# Altium PCB PCB1.PcbDoc
Units mm, origin at the board's own origin, x right, y up, seen from the top; angles counter-clockwise.
Board outline 83 x 101.6 mm, 2 copper layers (Top Layer, Bottom Layer); 60 components, 53 nets, 242 pads, 22 vias.
Unrouted connection lines stored in the file: 3.
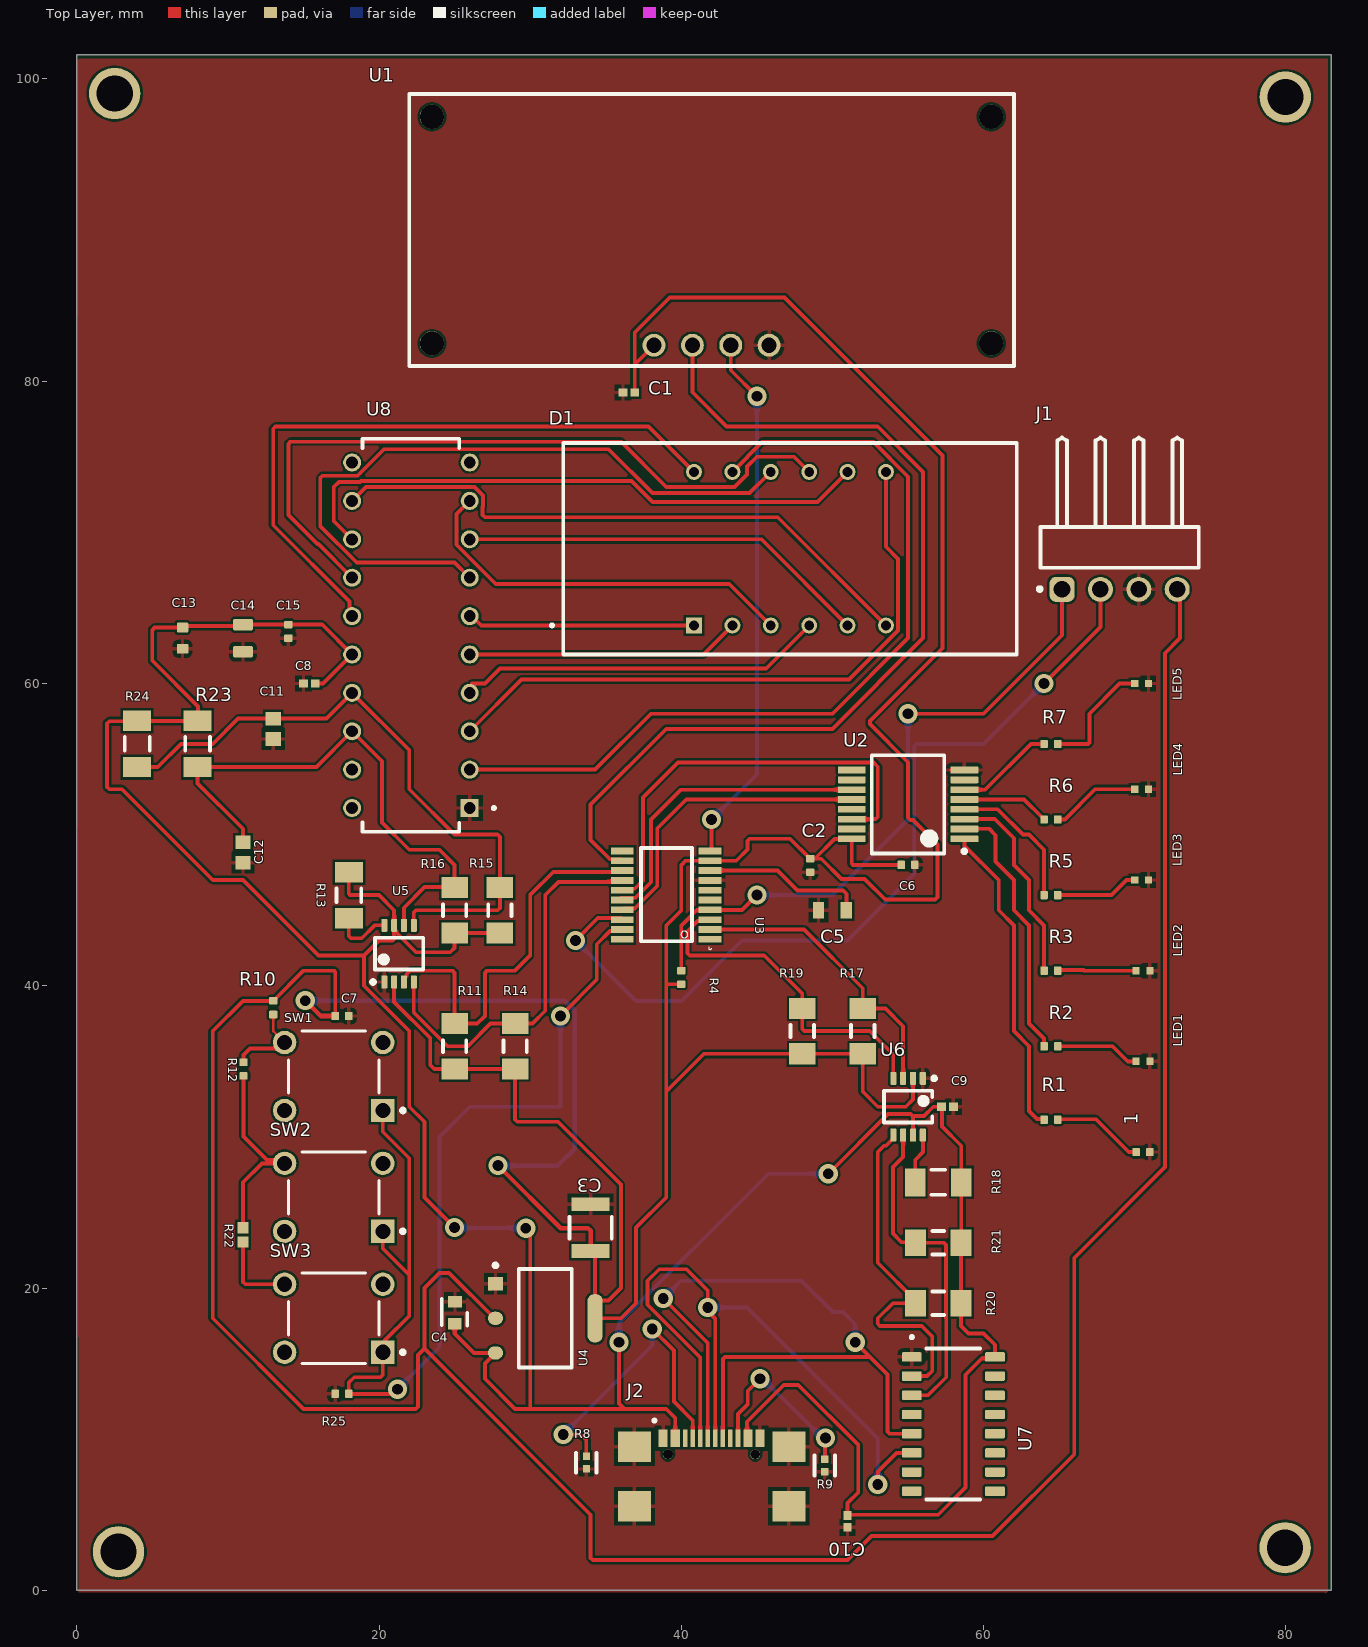
[diagram p0: Top Layer view]
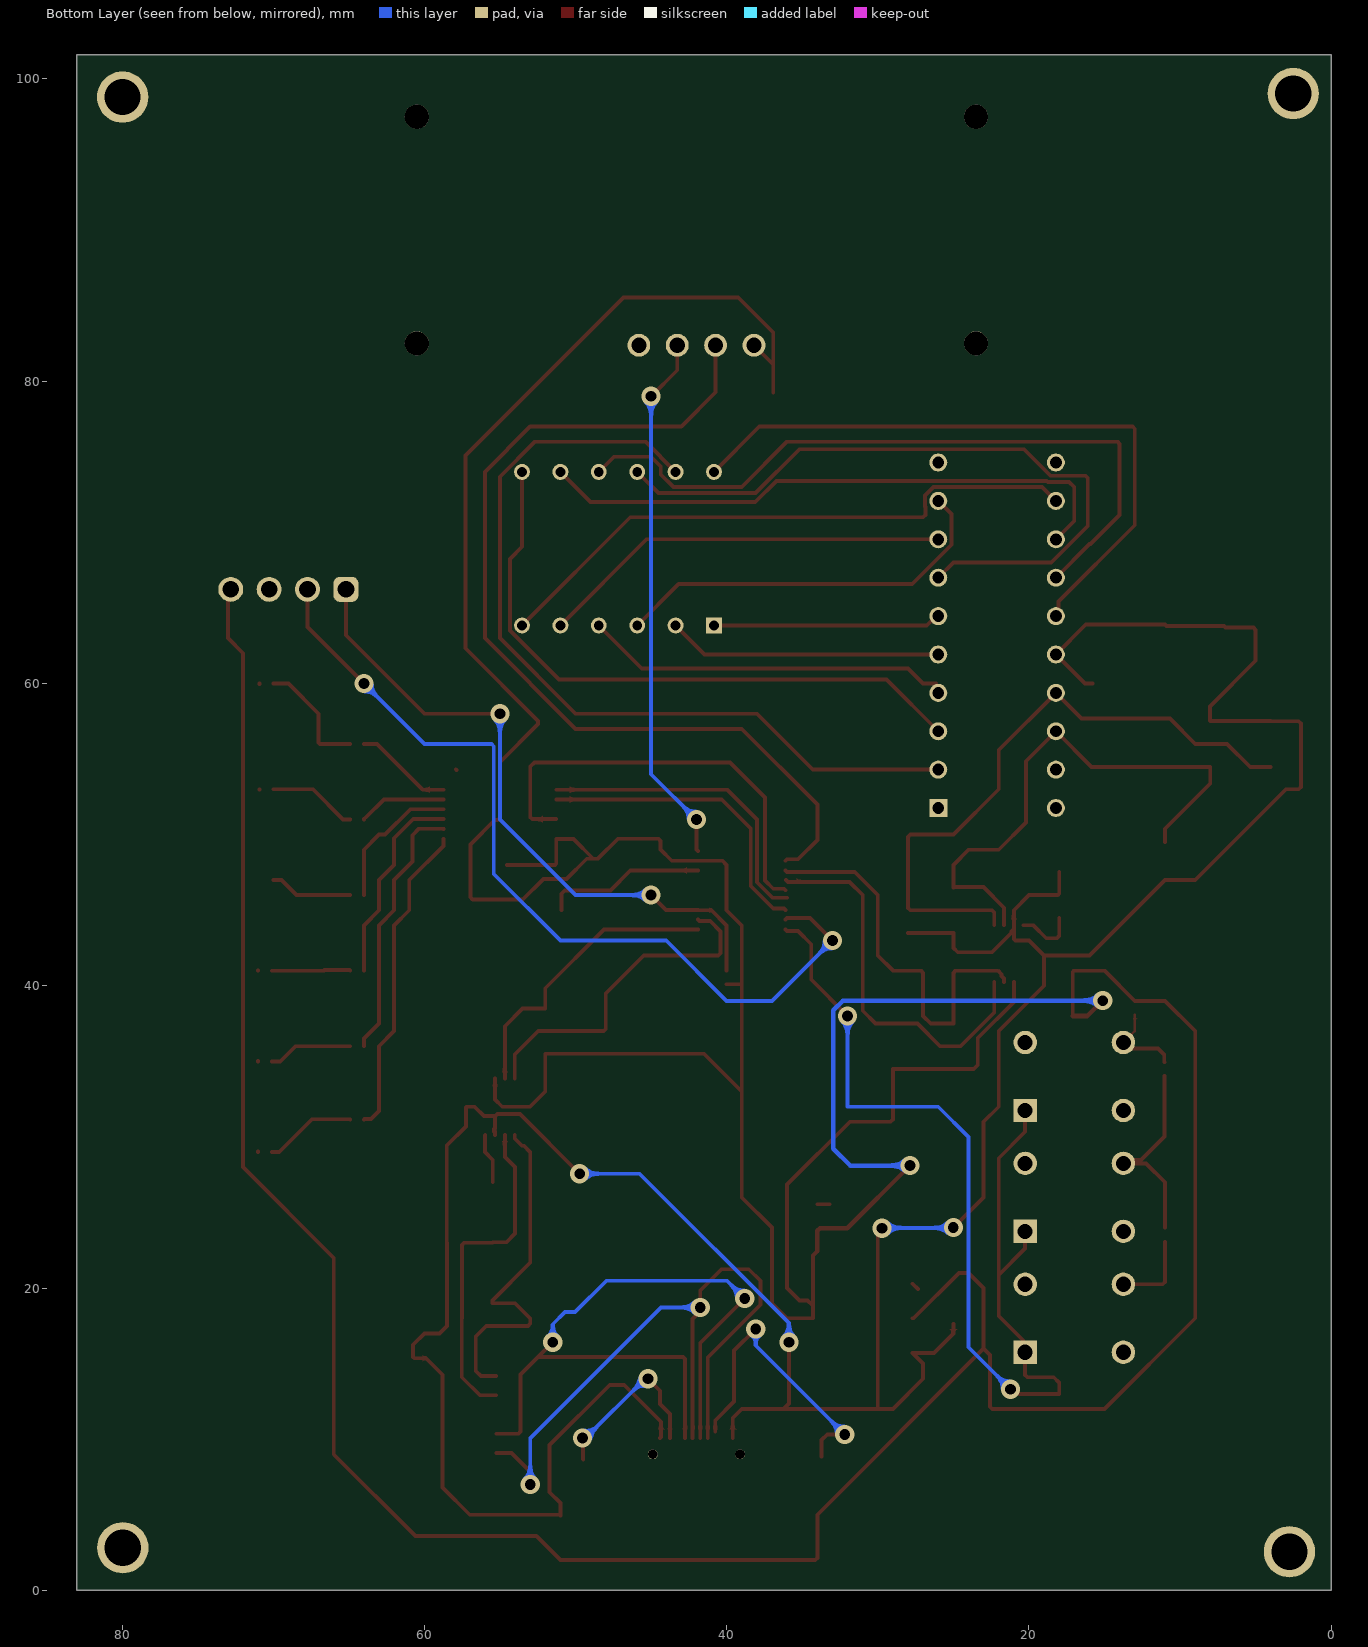
[diagram p1: Bottom Layer view, seen from below]
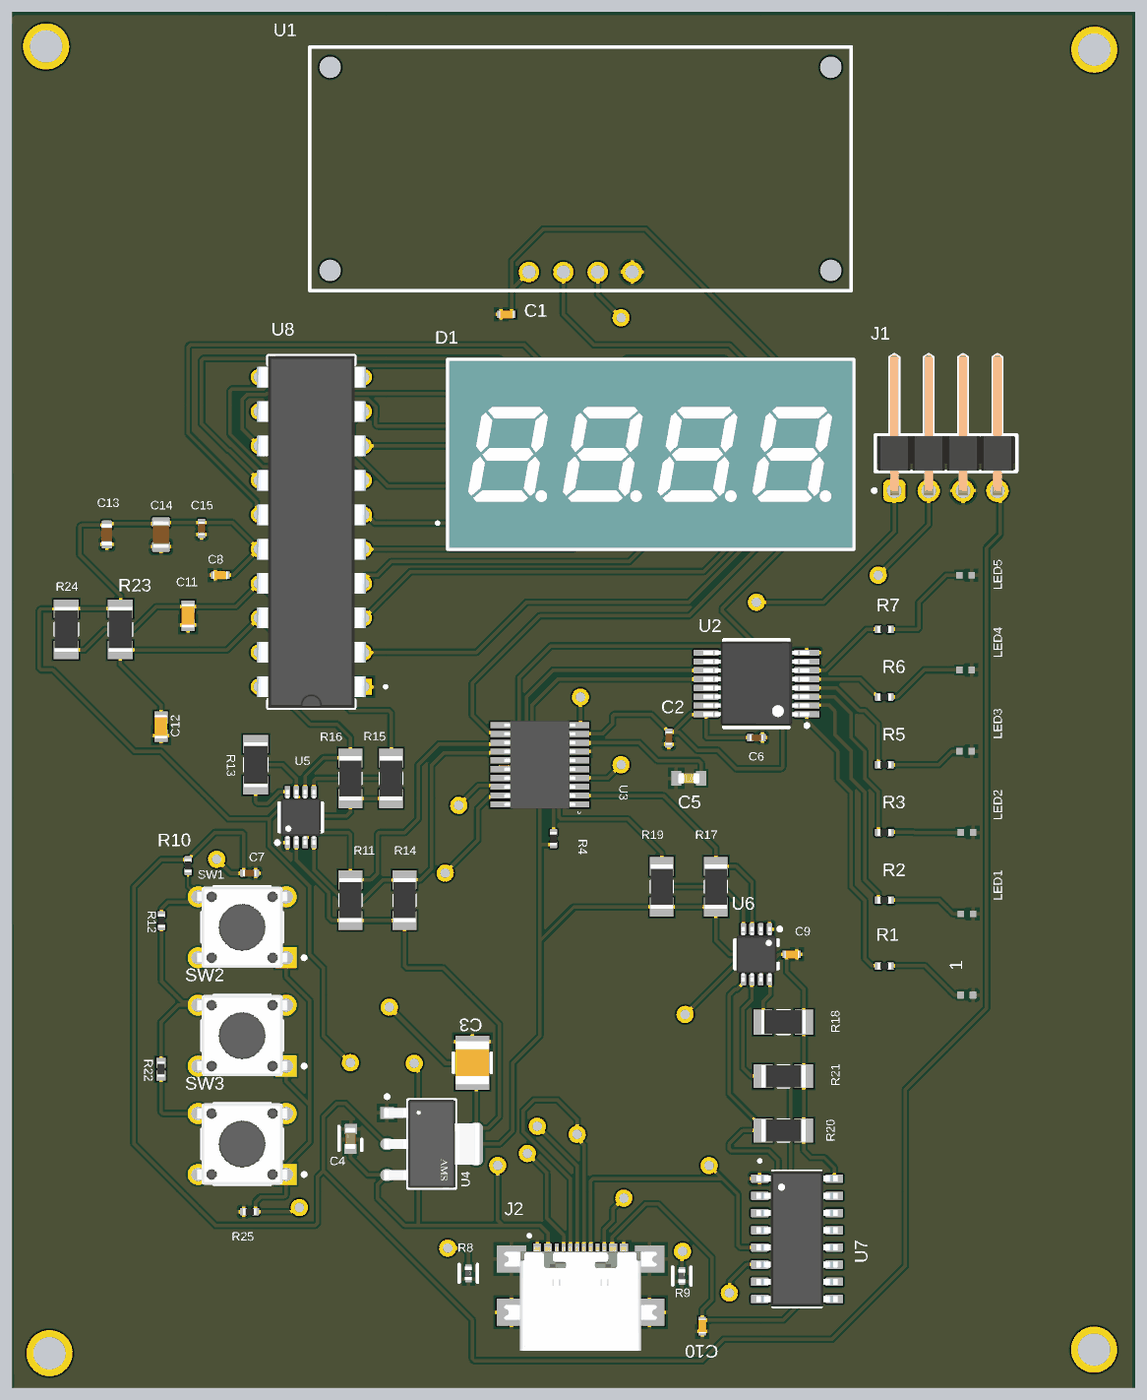
[diagram p2: 3D render of the assembled board from above, using the file's embedded part models]

## Layer stack, top to bottom
Top Solder: solder mask 0.0102, Solder Resist, Dk 3.5
Top Layer: signal copper 0.0356
Dielectric 1: dielectric 0.32, FR-4, Dk 4.8
Bottom Layer: signal copper 0.0356
Bottom Solder: solder mask 0.0102, Solder Resist, Dk 3.5

## Board outline
0,0 83,0 83,101.6 0,101.6

## Design rules (kind name [scope] priority, off if disabled: settings)
Clearance [All] p1: gap=0.152 ignorepadtopadclearanceinfootprint=FALSE
HoleSize [All] p1: absolutevalues=TRUE maxlimit=2.54 minlimit=0.3 maxpercent=80.000 minpercent=20.000
MinimumSolderMaskSliver [All] p1: minsoldermaskwidth=0.4
PolygonConnect [All] p1: connectstyle=Relief reliefconductorwidth=0.254 reliefentries=4 polygonreliefangle="90 Angle" airgapwidth=0.254
RoutingVias [All] p1: holewidth=0.711 width=1.27 viastyle="Through Hole" minholewidth=0.3 minwidth=1.27 maxholewidth=0.711 maxwidth=1.27
SolderMaskExpansion [All] p1: expansion=0.102 istentingtop=FALSE
SupplyNets "Schematic Supply Nets_4" [InNet('+5V')] p1: voltage=0.000
SupplyNets "Schematic Supply Nets_2" [InNet('GND')] p2: voltage=0.000
SupplyNets "Schematic Supply Nets" [InNet('+3.3V')] p3: voltage=0.000
Width [All] p1: maxlimit=0.3 minlimit=0.152 preferedwidth=0.254
28 further rules are at their usual default settings.

## Components (designator, comment, footprint, x,y, rotation, side; value= is the part's Value field where it differs from the comment)
1 "red_1" QTB-QBLP595_V#1 70.545,29 r180 top
C1 "Capacitor 0.1 uF +/- 5% 16 V 0402" CAPC1005X56X25LL10T15 36.528,79.25 r0 top value=100nF
C2 "Capacitor 100nF +/-20% 10V 0402" CAPC0402(1005)60_L 48.53,47.967 r90 top value=100nF
C3 "22uF" WCAP-CSGP_1210_L3.2W2.5H2.5 34,24 r270 top
C4 "10uF" FP-GRM18-0_15-MFG 25,18.411 r90 top
C5 "680nF" FP-CGA3E-0_3-0_1-IPC_B 50,45 r180 top
C6 "Capacitor 100nF +/-20% 10V 0402" CAPC0402(1005)60_L 55,48 r180 top value=100nF
C7 "Capacitor 100nF +/-20% 10V 0402" CAPC0402(1005)60_L 17.55,38 r0 top value=100nF
C8 "Capacitor 0.1 uF +/- 5% 16 V 0402" CAPC1005X56X25LL10T15 15.39,60 r180 top value=100nF
C9 "Capacitor 0.1 uF +/- 5% 16 V 0402" CAPC1005X56X25LL10T15 57.61,32 r0 top value=100nF
C10 "Capacitor 0.1 uF +/- 5% 16 V 0402" CAPC1005X56X25LL10T15 50.999,4.558 r90 top value=100nF
C11 "Capacitor 10 pF +/- 0.25 pF 50 V 0603" CAPC1608X87X35NL15T15 13,57 r90 top value=10pF
C12 "Capacitor 10 pF +/- 0.25 pF 50 V 0603" CAPC1608X87X35NL15T15 11,48.817 r90 top value=10pF
C13 "Capacitor 1µF +/-0.1% 25V 0603" CAPC0603(1608)100_L 7,63 r90 top value=1µF
C14 "Capacitor 100µF +/-20% 6.3V 0805" CAPC0805(2012)145_L 11,63 r90 top value=100µF
C15 "Capacitor 100nF +/-20% 10V 0402" CAPC0402(1005)60_L 14,63.45 r90 top value=100nF
D1 "LDQ-M3604RI" LED_LDQ-M3604RI 47.19,68.92 r0 top
J1 "STLINK" 61300411021 69,69 r180 top
J2 "TYPE C" GCT_USB4110GFA 42,9 r0 top
LED1 "red_2" QTB-QBLP595_V#2 70.545,35 r180 top
LED2 "QBLP595-IG" QTB-QBLP595_V#2 70.545,41 r180 top
LED3 "QBLP595-IG" QTB-QBLP595_V#2 70.455,47 r180 top
LED4 "QBLP595-IB" QTB-QBLP595_V#2 70.455,53 r180 top
LED5 "QBLP595-IB" QTB-QBLP595_V#2 70.455,60 r180 top
R1 "Resistor 240R +/-5 % 0402 63 mW" RESC0402(1005)_L 64.45,31.139 r0 top value=240
R2 "Resistor 240R +/-5 % 0402 63 mW" RESC0402(1005)_L 64.45,36 r0 top value=240
R3 "Resistor 240R +/-5 % 0402 63 mW" RESC0402(1005)_L 64.45,41 r0 top value=240
R4 "10KR2F" RESC0402(1005)_L 40,40.55 r270 top value=10k
R5 "Resistor 240R +/-5 % 0402 63 mW" RESC0402(1005)_L 64.45,46 r0 top value=240
R6 "Resistor 240R +/-5 % 0402 63 mW" RESC0402(1005)_L 64.45,51 r0 top value=240
R7 "Resistor 240R +/-5 % 0402 63 mW" RESC0402(1005)_L 64.45,56 r0 top value=240
R8 "5.1K" FP-RN73R1E-IPC_C 33.715,8.448 r90 top
R9 "5.1K" FP-RN73R1E-IPC_C 49.49,8.254 r90 top
R10 "1KR2J" RESC0402(1005)_L 13,38.55 r90 top value=1k
R11 "Resistor 1k +/-1% 1206 250 mW" RESC3116X70X50ML13T20 25,36 r90 top value=1k
R12 "5D6KR2J" RESC0402(1005)_L 11.033,34.49 r90 top value=5.6k
R13 "Resistor 100k +/-1% 1206 250 mW" RESC3216X60X45ML15T20 18,46 r90 top value=100k
R14 "Resistor 1k +/-1% 1206 250 mW" RESC3116X70X50ML13T20 29,36 r90 top value=1k
R15 "Resistor 1k +/-1% 1206 250 mW" RESC3116X70X50ML13T20 28,45 r90 top value=1k
R16 "Resistor 1k +/-1% 1206 250 mW" RESC3116X70X50ML13T20 25,45 r90 top value=1k
R17 "Resistor 1k +/-1% 1206 250 mW" RESC3116X70X50ML13T20 52,37 r90 top value=1k
R18 "Resistor 100k +/-1% 1206 250 mW" RESC3216X60X45ML15T20 57,27 r0 top value=100k
R19 "Resistor 1k +/-1% 1206 250 mW" RESC3116X70X50ML13T20 48,37 r90 top value=1k
R20 "Resistor 1k +/-1% 1206 250 mW" RESC3116X70X50ML13T20 57,19 r180 top value=1k
R21 "Resistor 1k +/-1% 1206 250 mW" RESC3116X70X50ML13T20 57,23 r180 top value=1k
R22 "Resistor 15k +/-1% 0402 63 mW" RESC1005X40X25ML10T10 11,23.525 r90 top value=15k
R23 "Resistor 10k +/-1% 1206 250 mW" RESC3216X60X45ML15T20 8,56 r90 top value=10k
R24 "Resistor 10k +/-1% 1206 250 mW" RESC3216X60X45ML15T20 4,56 r90 top value=10k
R25 "10KR2F" RESC0402(1005)_L 17.55,13 r0 top value=10k
SW1 "" FP-MJTP1230A-MFG 17,34 r180 top
SW2 "" FP-MJTP1230A-MFG 17,26 r180 top
SW3 "" FP-MJTP1230A-MFG 17,18 r180 top
U1 "SR-HC04" MODULE_4007 42,90 r0 top
U2 "SN74HC595N" DB0016A_M 55,52 r180 top
U3 "STM8S103F3P6" SOP65P640X120-20N 39,46 r180 top
U4 "AMS1117-3.3" FP-AMS1117-IPC_C 31,18 r0 top
U5 "PCA9306_TM1637" DCT0008A_L 21.325,42.125 r90 top
U6 "PCA9306_TTL" DCT0008A_L 55,32 r270 top
U7 "CH340C" SOIC127P600X180-16N 58,11 r0 top
U8 "TM1637" DIP778W43P254L2612H431Q20N 22.11,63.19 r180 top

## Footprints (in the part's own frame and the unit in brackets; to place one, negate y for a bottom-side part, rotate by r counter-clockwise, add the part's x,y. Pads: shape width x height; smd on the part's side, far side on the other; paste and mask are expansions set on the pad)
61300411021 [mm] "Pin Header, pitch 2.54 mm, THT, Angled, single row, 4p"
  rrect50% 1.65x1.65 hole 1.1: 1(3.81,2.77)
  round 1.65 hole 1.1: 2(1.27,2.77) 3(-1.27,2.77) 4(-3.81,2.77)
  silkscreen extent -5.23,-7.27 5.41,2.87, body extent -5.08,-7.27 5.08,3.09, height 2.58
CAPC0402(1005)60_L [mm] "Chip Capacitor, Body 1.0x0.5mm, Height 0.6mm, IPC High Density"
  rrect25% 0.5x0.55 smd: 1(-0.45,0) 2(0.45,0)
  body extent -0.5,-0.25 0.5,0.25, height 0.6
CAPC0603(1608)100_L [mm] "Chip Capacitor, Body 1.6x0.8mm, Height 1.0mm, IPC High Density"
  rrect25% 0.66x0.76 smd: 1(-0.7,0) 2(0.7,0)
  body extent -0.8,-0.4 0.8,0.4, height 0.95
CAPC0805(2012)145_L [mm] "Chip Capacitor, Body 2.0x1.2mm, Height 1.45mm, IPC High Density"
  rrect25% 0.76x1.3 smd: 1(-0.9,0) 2(0.89,0)
  body extent -1,-0.6 1,0.6, height 1.45
CAPC1005X56X25LL10T15 [mm] "Chip Capacitor, 2-Leads, Body 1.10x0.60mm, IPC High Density"
  rect 0.58x0.54 smd: 1(-0.39,0) 2(0.39,0)
  body extent -0.55,-0.3 0.55,0.3, height 0.56
CAPC1608X87X35NL15T15 [mm] "Chip Capacitor, 2-Leads, Body 1.75x0.95mm, IPC Medium Density"
  rect 0.9x1 smd: 1(-0.675,0) 2(0.675,0)
  body extent -0.87,-0.48 0.87,0.48, height 0.87
DB0016A_M [mm] "SOP, 16-Leads, Body 5.6x6.5mm, Pitch 0.65mm, IPC Low Density"
  rrect22% 1.85x0.45 smd: 1(-3.725,2.275) 2(-3.725,1.625) 3(-3.725,0.975) 4(-3.725,0.325) 5(-3.725,-0.325) 6(-3.725,-0.975) 7(-3.725,-1.625) 8(-3.725,-2.275) 9(3.725,-2.275) 10(3.725,-1.625) 11(3.725,-0.975) 12(3.725,-0.325) 13(3.725,0.325) 14(3.725,0.975) 15(3.725,1.625) 16(3.725,2.275)
  silkscreen extent -3.85,-3.25 2.4,3.25, body extent -3.91,-3.1 3.91,3.1, height 2
DCT0008A_L [mm] "SOP, 8-Leads, Body 2.9x3.2mm, Pitch 0.65mm, IPC High Density"
  rrect25% 0.85x0.4 smd: 1(-1.875,0.975) 2(-1.875,0.325) 3(-1.875,-0.325) 4(-1.875,-0.975) 5(1.875,-0.975) 6(1.875,-0.325) 7(1.875,0.325) 8(1.875,0.975)
  silkscreen extent -2,-1.6 1.05,1.85, body extent -2.01,-1.47 2.01,1.48, height 1.3
DIP778W43P254L2612H431Q20N [mm]
  rect 1.19x1.19 / inner round 1.19 / far side rect 1.19x1.19 hole 0.79: 1(-3.89,11.43)
  round 1.19 hole 0.79: 2(-3.89,8.89) 3(-3.89,6.35) 4(-3.89,3.81) 5(-3.89,1.27) 6(-3.89,-1.27) 7(-3.89,-3.81) 8(-3.89,-6.35) 9(-3.89,-8.89) 10(-3.89,-11.43) 11(3.89,-11.43) 12(3.89,-8.89) 13(3.89,-6.35) 14(3.89,-3.81) 15(3.89,-1.27) 16(3.89,1.27) 17(3.89,3.81) 18(3.89,6.35) 19(3.89,8.89) 20(3.89,11.43)
  silkscreen extent -5.59,-13 3.2,13, body extent -4.03,-13 4.03,13, height 4.31
FP-AMS1117-IPC_C [mm]
  rect 1.004x0.872 smd paste+0 mask+0: 1(-3.295,2.29)
  rrect100% 1.004x0.872 smd paste+0 mask+0: 2(-3.295,0) 3(-3.295,-2.29)
  rrect87% 1.004x3.182 smd paste+0 mask+0: 4(3.295,0)
  silkscreen extent -3.42,-3.25 1.75,3.62, body extent -3.9,-3.35 3.9,3.35, height 0.25
FP-CGA3E-0_3-0_1-IPC_B [mm]
  rect 0.756x1.106 smd paste+0 mask+0: 1(-0.925,0) 2(0.925,0)
  body extent -1.55,-0.8 1.55,0.8, height 0.25
FP-GRM18-0_15-MFG [mm]
  rect 0.75x0.9 smd paste+0 mask+0: 1(-0.775,0) 2(0.69,-0.023)
  silkscreen extent -0.88,-0.83 0.87,0.85, body extent -1.25,-0.58 1.25,0.58, height 0.25
FP-MJTP1230A-MFG [mm]
  rect 1.55x1.55 hole 1 paste-2539.97 mask+0: 1(-3.25,2.25)
  round 1.55 hole 1 paste-2539.97 mask+0: 2(3.25,2.25) 3(-3.25,-2.25) 4(3.25,-2.25)
  silkscreen extent -4.7,-3 3,2.37, body extent -4.13,-3.13 4.13,3.13, height 0.25
FP-RN73R1E-IPC_C [mm]
  rect 0.488x0.472 smd paste+0 mask+0: 1(-0.414,0) 2(0.414,0)
  silkscreen extent -0.66,-0.67 0.66,0.67, body extent -0.76,-0.38 0.76,0.38, height 0.25
GCT_USB4110GFA [mm]
  rect 0.6x1.15 smd mask+0.1: A1/B12(-3.2,1.075) B1/A12(3.2,1.075)
  rect 0.6x1.15 smd: A4/B9(-2.4,1.075) B4/A9(2.4,1.075)
  rect 0.3x1.15 smd: A5(-1.25,1.075) A6(-0.25,1.075) A7(0.25,1.075) A8(1.25,1.075) B5(1.75,1.075) B6(0.75,1.075) B7(-0.75,1.075) B8(-1.75,1.075)
  rect 2.18x2 smd mask+0.002: S1(-5.11,0.5) S2(5.11,0.5)
  rect 2.18x2 smd: S3(-5.11,-3.43) S4(5.11,-3.43)
  round 0.65 hole 0.65 unplated: ""(-2.89,0) ""(2.89,0)
  silkscreen extent -3.88,2.13 -3.68,2.33, body extent -5.65,-6.28 5.65,1.42, height 3.26
LED_LDQ-M3604RI [mm]
  rect 1.05x1.05 / inner round 1.05 / far side rect 1.05x1.05 hole 0.65: 1(-6.35,-5.08)
  round 1.05 hole 0.65: 2(-3.81,-5.08) 3(-1.27,-5.08) 4(1.27,-5.08) 5(3.81,-5.08) 6(6.35,-5.08) 7(6.35,5.08) 8(3.81,5.08) 9(1.27,5.08) 10(-1.27,5.08) 11(-3.81,5.08) 12(-6.35,5.08)
  silkscreen extent -15.85,-7 15,7, body extent -15,-7 15,7, height 7.2
MODULE_4007 [mm]
  round 1.508 hole 1: 1(-3.81,-7.62) 2(-1.27,-7.62) 3(1.27,-7.62) 4(3.81,-7.62)
  round 1.6 hole 1.6 unplated: ""(-18.5,-7.5) ""(-18.5,7.5) ""(18.5,-7.5) ""(18.5,7.5)
  silkscreen extent -20,-9 20,9
QTB-QBLP595_V#1 [mm] "SMD, 2-Leads, Body 1x0.5mm"
  rrect25% 0.5x0.55 smd mask-0.05: 1(-0.455,0) 2(0.455,0)
  body extent -0.5,-0.25 0.5,0.25, height 0.5
QTB-QBLP595_V#2 [mm] "SMD, 2-Leads, Body 1x0.5mm"
  rect 0.472x0.488 smd paste+0 mask+0: 1(-0.455,0) 2(0.455,0)
  body extent -0.5,-0.25 0.5,0.25, height 0.5
RESC0402(1005)_L [mm] "Chip Resistor, Body 1.0x0.5mm, IPC High Density"
  rrect25% 0.5x0.55 smd: 1(-0.45,0) 2(0.45,0)
  body extent -0.5,-0.25 0.5,0.25, height 0.3
RESC1005X40X25ML10T10 [mm] "Chip Resistor, 2-Leads, Body 1.1x0.6mm, IPC Low Density"
  rect 0.75x0.7 smd: 1(-0.475,0) 2(0.475,0)
  body extent -0.55,-0.27 0.55,0.28, height 0.4
RESC3116X70X50ML13T20 [mm] "Chip Resistor, 2-Leads, Body 3.25x1.65mm, IPC Low Density"
  rect 1.4x1.75 smd: 1(-1.5,0) 2(1.5,0)
  silkscreen extent -0.4,-0.77 0.4,0.77, body extent -1.63,-0.82 1.63,0.82, height 0.7
RESC3216X60X45ML15T20 [mm] "Chip Resistor, 2-Leads, Body 3.3x1.75mm, IPC Low Density"
  rect 1.35x1.85 smd: 1(-1.525,0) 2(1.525,0)
  silkscreen extent -0.45,-0.82 0.45,0.82, body extent -1.65,-0.87 1.65,0.87, height 0.6
SOIC127P600X180-16N [mm]
  rrect25% 1.31x0.62 smd: 1(-2.75,4.445) 2(-2.75,3.175) 3(-2.75,1.905) 4(-2.75,0.635) 5(-2.75,-0.635) 6(-2.75,-1.905) 7(-2.75,-3.175) 8(-2.75,-4.445) 9(2.75,-4.445) 10(2.75,-3.175) 11(2.75,-1.905) 12(2.75,-0.635) 13(2.75,0.635) 14(2.75,1.905) 15(2.75,3.175) 16(2.75,4.445)
  silkscreen extent -2.85,-5 1.78,5.85, body extent -3,-5 3,5, height 1.8
SOP65P640X120-20N [mm]
  rect 1.5x0.45 smd: 1(-2.9,2.925) 2(-2.9,2.275) 3(-2.9,1.625) 4(-2.9,0.975) 5(-2.9,0.325) 6(-2.9,-0.325) 7(-2.9,-0.975) 8(-2.9,-1.625) 9(-2.9,-2.275) 10(-2.9,-2.925) 11(2.9,-2.925) 12(2.9,-2.275) 13(2.9,-1.625) 14(2.9,-0.975) 15(2.9,-0.325) 16(2.9,0.325) 17(2.9,0.975) 18(2.9,1.625) 19(2.9,2.275) 20(2.9,2.925)
  silkscreen extent -3,-3.11 1.66,3.6, body extent -3.2,-3.25 3.2,3.25, height 0.53
WCAP-CSGP_1210_L3.2W2.5H2.5 [mm] "Ceramic Capacitors, body 3.2x2.5mm"
  rect 0.9x2.5 smd: 1(-1.55,0) 2(1.55,0)
  silkscreen extent -0.72,-1.4 0.72,1.4, body extent -1.6,-1.25 1.6,1.25, height 2.5

## Part data
1 LED1: library part CMP-007-00040-3, "Chip LED 0402, Red, 0.02 A, 2.0 to 2.5 V, -40 to 80 degC, 2-Pin SMD, RoHS, Tape and Reel", Case/Package=0402, Colour=Red, Mounting Technology=SMT, Pins=2, RoHS Compliant=Yes
C1 C8 C9 C10: library part CMP-001-00001-6, "Chip Capacitor, 0.1 uF, +/- 5%, 16 V, 0402 (1005 Metric)", Capacitor Type=Ceramic, Case/Package=0402, Max Operating Temperature=125°C, Min Operating Temperature=-55°C, Tolerance=5%, Voltage Rating=16V, Mounting Technology=SM, Pins=2, RoHS Compliant=True
C2 C6 C7 C15: library part CMP-001-00061-3, "Chip Capacitor, 100nF +/-20%, 10V, 0402, Thickness 0.6 mm", Case/Package=0402, Max Operating Temperature=85°C, Min Operating Temperature=-55°C, Tolerance=20%, Voltage Rating=10V, Mounting Technology=SMT, Pins=2
C3: library part CMP-03913-54202747-1, "885012209006 Multilayer Ceramic Capacitor, Wcap-Csgp Series, 22 F, 10%, X7R, 10 V, 1210 [3225 Metric] Rohs Compliant: Yes", Capacitance=22µF, Case Code (Imperial)=1210, Case Code (Metric)=3225, Dielectric=X7R, Insulation Resistance=20MΩ, Max Operating Temperature=125°C, Min Operating Temperature=-55°C, Tolerance=10%, Voltage Rating=10V, Case/Package=1210, Height=2.5mm, Length=3.2mm, Mount="Surface Mount", NexarPartId=54202747, Packaging="Tape & Reel (TR)", REACH SVHC=Unknown, RoHS=Compliant, Thickness=2.794mm, Voltage Rating (DC)=10V, Width=2.5mm
C4: library part CMP-2000-05448-2, "CAP CER 10UF 10V X5R 0603", Manufacturer=Murata, Manufacturer Part Number=GRM188R61A106KE69D, Package=GRM18-0.15, Temperature="-55°C to +85°C", Temperature Characteristic=X5R, Temperature Coefficient=15%, Temperature Range High=+85°C, Temperature Range Low=-55°C, Tolerance=10%, Voltage Rating=10V, Automotive=No, Capacitance=10uF, Category=Cap, ComponentLink2Description=Datasheet, ComponentLink2URL=https://search.murata.co.jp/Ceramy/image/img/A01X/G101/ENG/GRM188R61A106KE69-01A.pdf, Device Class L1="Passive Components", Device Class L2=Capacitors, Device Class L3="Ceramic Capacitors", Digikey Description="CAP CER 10UF 10V X5R 0603", Height=0.95mm, Lead Free=Yes, Material=Ceramic, Mouser Description="Multilayer Ceramic Capacitors MLCC - SMD/SMT 0603 10uF 10volts X5R + - 10%", Octopart=https://octopart.com/grm188r61a106ke69d-murata-22851381, RoHS=TRUE
C5: library part CMP-08246-000719-1, "Cap Ceramic 680nF 16V X7R 10% Pad SMD 0603 +125°C Automotive T/R", Case Code (Imperial)=0603, Case Code (Metric)=1608, Dielectric=X7R, Max Operating Temperature=125°C, Min Operating Temperature=-55°C, Package Quantity=1, Ratings=AEC-Q200, Tolerance=10%, Voltage Rating=16V, Capacitance=680nF, Case/Package=0603, Composition=Ceramic, Depth=0.8mm, Height=0.8mm, Lead Free="Lead Free", Length=1.6mm, Mount="Surface Mount", Packaging="Tape and Reel", REACH SVHC="No SVHC", Termination=SMD/SMT, Thickness=0.035inch, Voltage Rating (DC)=16V, Weight=7.1E-05oz, Width=0.031inch
C11 C12: library part CMP-001-00012-6, "Chip Capacitor, 10 pF, +/- 0.25 pF, 50 V, 0603 (1608 Metric)", Capacitor Type=Ceramic, Case/Package=0603, Max Operating Temperature=125°C, Min Operating Temperature=-55°C, Tolerance=0.25%, Voltage Rating=50V, Mounting Technology=SM, Pins=2, RoHS Compliant=True
C13: library part CMP-001-00055-4, "Chip Capacitor, 1µF +/-0.1%, 25V, 0603, Thickness 1 mm", Case/Package=0603, Max Operating Temperature=85°C, Min Operating Temperature=-55°C, Tolerance=20%, Voltage Rating=25V, Mounting Technology=SMT, Pins=2
C14: library part CMP-001-00054-4, "Chip Capacitor, 100µF +/-20%, 6.3V, 0805, Thickness 1.45 mm", Case/Package=0805, Max Operating Temperature=85°C, Min Operating Temperature=-55°C, Tolerance=10%, Voltage Rating=6.3V, Mounting Technology=SMT, Pins=2
D1: library part CMP-004-00032-1, "Display, Seven Segment, 9.2MM, Red", Case/Package=None, Check_prices=https://www.snapeda.com/parts/LDQ-M3604RI/Lumex/view-part/?ref=eda, Component Type=Standard, Design Item ID=LDQ-M3604RI, MF=Lumex, MP=LDQ-M3604RI, Pins=12, SnapEDA_Link=https://www.snapeda.com/parts/LDQ-M3604RI/Lumex/view-part/?ref=snap, Source=LDQ-M3604RI.SchLib
J1: library part CMP-007-000000-1, Color=Black, Contact Resistance=20m?, Current Rating=3A, Operating Supply Voltage=250V, Component Type=Standard, Connector Type="Male Pin", Contact Material=Copper, Contact Mating Length=5.9944mm, Contact Plating=Gold, Design Item ID=CMP-1502-01063-3, Gender=Male, Lead Pitch=2.54mm, Mount="Through Hole", NexarPartId=31153320, Number of Contacts=4, Number of Pins=4, Number of Positions=4, Number of Rows=1, Pin Count=4, Pitch=2.54mm, REACH SVHC=Unknown, RoHS=Compliant, Source="Components - 25.08.25 - 11.48.SchLib", Termination=Solder
J2: library part CMP-002-00071-1, "USB-C (USB TYPE-C) USB 2.0 Receptacle Connector 24 (16+8 Dummy) Position Surface Mount, Right Angle", Case/Package=None, Check_prices=https://www.snapeda.com/parts/USB4110GFA/Global+Connector+Technology/view-part/?ref=eda, Component Type=Standard, Design Item ID=USB4110GFA, MF="Global Connector Technology", MP=USB4110GFA, Pins=16, SnapEDA_Link=https://www.snapeda.com/parts/USB4110GFA/Global+Connector+Technology/view-part/?ref=snap, Source=USB4110GFA.SchLib
LED2 LED3: library part CMP-007-00041-3, "Chip LED 0402, Green, 0.02 A, 3.1 to 3.7 V, -40 to 80 degC, 2-Pin SMD, RoHS, Tape and Reel", Case/Package=0402, Colour=Green, Mounting Technology=SMT, Pins=2, RoHS Compliant=Yes
LED4 LED5: library part CMP-007-00042-3, "Chip LED 0402, Blue, 0.02 A, 3.1 to 3.7 V, -40 to 80 degC, 2-Pin SMD, RoHS, Tape and Reel", Case/Package=0402, Colour=Blue, Mounting Technology=SMT, Pins=2, RoHS Compliant=Yes
R1 R2 R3 R5 R6 R7: library part CMP-009-00155-3, "Chip Resistor, 240 Ohms, +/-5 %, 63 mW, -55 to 155 degC, 0402", Case/Package=0402, Max Operating Temperature=155°C, Min Operating Temperature=-55°C, Power=63mW, Tolerance=5%, Pins=2
R4 R25: library part CMP-009-00066-2, "10K 0.063W 1% 0402 (1005 Metric)  SMD", Case/Package=0402, Power=63mW, Tolerance=1%, Mounting Technology=SMT, Pins=2
R8 R9: library part CMP-04015-008529-1, "5.1kΩ ±1% 0.063W, 1/16W Chip Resistor 0402 (1005 Metric) Moisture Resistant Thin Film"
R10: library part CMP-009-00075-2, "1K 0.063W 5% 0402 (1005 Metric)  SMD", Case/Package=0402, Power=63mW, Tolerance=5%, Mounting Technology=SMT, Pins=2
R11 R14 R15 R16 R17 R19 R20 R21: library part CMP-009-00011-5, "Chip Resistor, 1 KOhm, +/- 1%, 0.25 W, -55 to 155 degC, 1206 (3216 Metric)", Case/Package=1206, Max Operating Temperature=155°C, Min Operating Temperature=-55°C, Power=250mW, Tolerance=1%, Voltage Rating=200V, Mounting Technology=SM, Pins=2, RoHS Compliant=True
R12: library part CMP-009-00108-2, "5K6 0.063W 5% 0402 (1005 Metric)  SMD", Case/Package=0402, Power=63mW, Tolerance=5%, Mounting Technology=SMT, Pins=2
R13 R18: library part CMP-009-00025-5, "Chip Resistor, 100 KOhm, +/- 1%, 0.25 W, -55 to 155 degC, 1206 (3216 Metric)", Case/Package=1206, Max Operating Temperature=155°C, Min Operating Temperature=-55°C, Power=250mW, Tolerance=1%, Voltage Rating=200V, Mounting Technology=SM, Pins=2, RoHS Compliant=True
R22: library part CMP-009-00026-5, "Chip Resistor, 15 KOhm, +/- 1%, 0.063 W, -55 to 155 degC, 0402 (1005 Metric)", Case/Package=0402, Max Operating Temperature=155°C, Min Operating Temperature=-55°C, Power=63mW, Tolerance=1%, Mounting Technology=SM, Pins=2, RoHS Compliant=True
R23 R24: library part CMP-009-00016-5, "Chip Resistor, 10 KOhm, +/- 1%, 0.25 W, -55 to 155 degC, 1206 (3216 Metric)", Case/Package=1206, Max Operating Temperature=155°C, Min Operating Temperature=-55°C, Power=250mW, Tolerance=1%, Voltage Rating=200V, Mounting Technology=SM, Pins=2, RoHS Compliant=True
SW1 SW2 SW3: library part CMP-47024-000004-1, "SWITCH TACTILE SPST-NO 0.05A 12V", Actuator Color=Black, Contact Resistance=100mR, Current Rating=50mA, Max Operating Temperature=70°C, Max Voltage Rating (DC)=12V, Min Operating Temperature=-20°C, Operating Force=160gf, Package Quantity=2000, Actuator Length=1.4mm, Actuator Material=Thermoplastic, Actuator Type=Standard, Color=Black, Contact Material=Bronze, Contact Plating=Silver, Electrical Life=100000Cycles, Illumination Type=Non-Illuminated, Mechanical Life=100000Cycles, Mount="Through Hole", Orientation=Straight, Packaging=Bulk, REACH SVHC="No SVHC", RoHS Compliant=Yes, Series=MJTP, Switch Function=Off-Mom, Switch Travel=0.25mm, Termination="PC Pin", Throw Configuration=SPST, Voltage Rating (DC)=12V
U1: library part CMP-015-000000-1, "Ultrasonic Distance Sensor - 3V or 5V - HC-SR04 compatible - RCWL-1601", Package=None, Check_prices=https://www.snapeda.com/parts/4007/Adafruit+Industries+LLC/view-part/?ref=eda, Component Type=Standard, Design Item ID=4007, MF="Adafruit Industries", MP=4007, Pin Count=4, SnapEDA_Link=https://www.snapeda.com/parts/4007/Adafruit+Industries+LLC/view-part/?ref=snap, Source=4007.SchLib
U2: library part CMP-0780-00077-3, "8-Bit Shift Registers With 3-State Output Registers, DB0016A, LARGE T&R", F @ Nom Voltage(Max)(Mhz)=28, Generic Part Number=SN74HC595, ICC @ Nom Voltage(Max)(mA)=0.08, Manufacturer="Texas Instruments", Operating Temperature Range(C)="-40 to 85", Rating=Military, tpd @ Nom Voltage(Max)(ns)=34, Voltage(Nom)(V)=6, 3-State Output=Yes, Code_JEDEC=MO-150, DatasheetVersion=SCLS041H, Input Type=CMOS, Output Drive (IOL/IOH)(Max)(mA)=7.8/-7.8, Output Type=CMOS, PackageReference=DB0016A, PackageVersion=http://www.ti.com/lit/ml/mpds507/mpds507.pdf, Technology Family=HC, VCC(Max)(V)=6, VCC(Min)(V)=2
U3: library part CMP-031-00006-1, "STM8 series Microcontroller IC 8-Bit 16MHz 8KB (8K x 8) FLASH 20-TSSOP", Case/Package="TSSOP-20 STMicroelectronics", Check_prices=https://www.snapeda.com/parts/STM8S103F3P6/STMicroelectronics/view-part/?ref=eda, Component Type=Standard, Design Item ID=STM8S103F3P6, MF=STMicroelectronics, MP=STM8S103F3P6, Pins=20, SnapEDA_Link=https://www.snapeda.com/parts/STM8S103F3P6/STMicroelectronics/view-part/?ref=snap, Source=STM8S103F3P6.SchLib
U4: library part CMP-209535-000001-1, "LDO Voltage Regulators 1A, 3.3V", Dropout Voltage=1.1V, Manufacturer="Advanced Monolithic Systems", Max Junction Temp=+125°C, Max Power Dissipation=1.2W, Max Supply Voltage=15V, Nominal Supply Current=5mA, Output Current=1A, Output Voltage=3.3V, Package=AMS1117, Temperature="-40°C to +125°C", Temperature Range Low=-40°C, Automotive=No, Category=IC, ComponentLink2Description=Datasheet, ComponentLink2URL=http://www.advanced-monolithic.com/pdf/ds1117.pdf, Device Class L1="Integrated Circuits (ICs)", Device Class L2="Power Management ICs", Device Class L3="Voltage Regulators - Linear", Height=1.8mm, Ipc Land Pattern Name=SOT229P700X180-4, Lead Free=Yes, Manufacturer Part Number=AMS1117-3.3, Number Of Outputs=1, Octopart=https://octopart.com/ams1117-3.3-advanced+monolithic+systems-25899300, Output Type=Fixed, RoHS=TRUE, Standoff Height=0.64mm, Temperature Range High=+125°C
U5 U6: library part CMP-0314-00283-2, "Dual Bi-Directional I2C-Bus and SMBus Voltage Level-Translator, 0 to 5.5 V, -40 to 85 degC, 8-pin SM8 (DCT), Green (RoHS & no Sb/Br)", 5V Tolerant I/O=Yes, Manufacturer="Texas Instruments", Max Frequency(kHz)=400, On-Chip Power-on-Reset=No, PartNumber=PCA9306DCTR, Rating=Catalog, Code_JEDEC=MO-187-DA, ComponentLink1Description=Datasheet, ComponentLink1URL=http://www.ti.com/general/docs/lit/getliterature.tsp?genericPartNumber=PCA9306&fileType=pdf, ComponentLink2Description="Package Specification", ComponentLink2URL=http://www.ti.com/litv/pdf/mpds049b, DatasheetVersion=SCPS113J, Eco-Plan="Green (RoHS & no Sb/Br)", Enable Pin=Yes, fSCLK(Max)(MHz)=400, Function="Voltage Translator", Mounting Technology="Surface Mount", No. of Outputs=2, Open Drain I/O Type=Yes, PackageDescription="8-Pin Thin Small Outline Package 3 x 2.8 mm Body ,0.65 mm Pitch", PackageReference=DCT0008A, PackageVersion="revC, Sep-2002", SubFamily="I2C Special Function", tpd max(ns)=1.5, Vcc range(V)="0 to 5.5"
U7: library part CMP-030-000000-1, "USB to serial chip CH340", Package=None, Availability="Not in stock", Check_prices=https://www.snapeda.com/parts/CH340C/WCH/view-part/?ref=eda, Component Type=Standard, Design Item ID=CH340C, MF=WCH, MP=CH340C, Pin Count=16, Price=None, SnapEDA_Link=https://www.snapeda.com/parts/CH340C/WCH/view-part/?ref=snap, Source=CH340C.SchLib
U8: library part CMP-005-000000-1, "LED Drive Control Special Circuit", Package=None, Check_prices=https://www.snapeda.com/parts/TM1637/Titan+Micro+Electronics/view-part/?ref=eda, Component Type=Standard, Design Item ID=TM1637, MF="Titan Micro Electronics", MP=TM1637, Pin Count=20, SnapEDA_Link=https://www.snapeda.com/parts/TM1637/Titan+Micro+Electronics/view-part/?ref=snap, Source=TM1637.SchLib

## Free pads (board coordinates)
  round 3.4 hole 2.4: 8(2.512,99.035)
  round 3.4 hole 2.4 unplated: 14(79.948,2.82) 15(2.762,2.554) 17(79.968,98.802)

## Via types
v1: diameter 1.27, hole 0.711, Top Layer to Bottom Layer, 22 vias

## Nets (pads, with @x,y where several pads share a name; then routed paths per layer and width w, separated by ;. In a path a pad name is that pad's centre, name@x,y a point inside that pad or via, vN(x,y) a via of type N, cw(c..) or ccw(c..) an arc to the next point about the centre after c; other vN are vias at no path point)
+3.3V: C1.2 C2.2 C3.2 C6.2 C7.1 J1.4 R4.2 R10.2 R11.1 R14.1 R17.1 R19.1 U1.1 U2.16 U3.9 U4.2 U4.4 U5.2 U6.2 | length 406.6
  Top Layer w0.254: C7.1 17.1,40.918 17.018,41 15,41 R10.2 11,39 9,37 9,18 15,12 22.418,12 22.567,12.149 22.567,15.567 23,16 ; U5.2 21,38.93 23.385,36.545 23.385,34.767 23.652,34.5 R14.1 29,31.149 29.149,31 31.851,31 36,26.851 36,20 35.178,19.178 34.647,19.178 U4.4@34.295,18.827 ; U4.2 27.639,18 24.639,21 24,21 23,20 23,16 ; C3.2 34.295,22.155 U4.4@34.295,18.827 ; C1.2 36.918,83.229 39.234,85.545 46.818,85.545 57.282,75.081 57.282,62.336 52.473,57.527 52.473,57.316 55,54.789 55,51.121 55.149,50.972 55.341,50.972 56.954,49.359 56.954,45.854 56.805,45.705 53.494,45.705 52.126,47.074 50.592,47.074 49.258,48.408 48.826,48.408 ; 36.998,81.188 U1.1 ; R4.2 39.1,40.1 39,40 ; C6.2 51.347,48 51.275,48.072 U2.16 51.265,49.715 50.133,49.715 48.826,48.408 ; U6.2 55.325,32.474 54.851,32 53,32 52,33 R17.1 R19.1 41.5,35.5 39,33 ; J1.4 73,66.04 73,63 72,62 72,28 66,22 66,9 60.594,3.594 52.594,3.594 51,2 34.149,2 34,2.149 34,5 23,16 ; U4.4@34.295,18.827 U4.4 36,18 37,19 37,24 39,26 39,33 ; 39,33 39,40 ; 39,40 39,44 40,45 40,48 40.275,48.275 U3.9 43.632,48.275 44.37,49.013 44.37,49.576 44.519,49.725 47.197,49.725 48.505,48.417 C2.2 48.539,48.408 48.826,48.408
  Top Layer w0.3: v1(15.118,39.018) 16.136,38 C7.1 ; v1(27.869,28.105) 32.014,23.96 33.824,23.96 34,23.784 C3.2
  Bottom Layer w0.3: v1(15.118,39.018) 32.308,39.018 32.937,38.388 32.937,29.209 31.833,28.105 v1(27.869,28.105)
+5V: C4.1 C8.1 C9.1 C10.2 C13.2 C14.2 C15.2 J2.A4/B9 J2.B4/A9 R13.2 R15.1 R16.1 R18.2 R20.1 R21.1 R23.2 R24.2 U4.3 U5.7 U6.7 U7.16 U8.16 | length 220.4
  Top Layer w0.254: C8.1 15.782,60.002 16.302,60.002 U8.16 16.24,63.9 C15.2 13.995,63.895 11.005,63.895 C14.2 10.905,63.795 7.095,63.795 C13.2 5.149,63.7 5,63.551 5,61.503 8.022,58.481 8.022,57.547 R23.2 R24.2 3.981,57.506 2.149,57.506 2,57.357 2,53.149 2.149,53 3,53 9,47 11,47 16,42 19,42 ; R13.2 18,46.089 18.089,46 20,46 21,45 U5.7 U5.7@21,43.775 ; C4.1 25,17 26.29,15.71 U4.3 27.705,15.705 27,15 27,14 29,12 30,12 ; v1(25,24) 23,26 23,31 22,32 22,37 19,40 19,42 ; R15.1 R16.1 25,42.5 24.715,42.215 22.444,42.215 21.171,43.489 21.171,43.604 U5.7@21,43.775 ; v1@29.851,24 30,23.851 30,12 ; v1(35.882,16.421) 35.882,12.355 36.237,12 ; J2.A4/B9 39.6,11.4 39,12 36.237,12 ; J2.B4/A9 44.346,10.129 44.346,11.152 46.775,13.581 47.738,13.581 51.711,9.608 51.711,6.49 50.999,5.777 C10.2 ; v1(49.728,27.564) 53.673,31.51 55.176,31.51 55.325,31.361 U6.7@55.325,30.539 ; C10.2@50.999,4.999 51,5 57,5 58.794,6.794 58.794,14.262 59.888,15.356 60.661,15.356 U7.16 60.75,16.25 60,17 59,17 58.5,17.5 R20.1 R21.1 58.525,23.025 R18.2 58.525,29.413 57.237,30.701 57.237,31.94 C9.1@57.248,31.951 ; 55.298,31.388 56.06,31.388 56.673,32 C9.1 ; U6.7 U6.7@55.325,30.35 ; U6.7@55.398,30.35 U6.7@55.398,30.539 ; 19,42 20,43 20.911,43 21,43.089 U5.7@21,43.775 ; 30,12 36.237,12
  Bottom Layer w0.254: v1(25,24) 25.02,23.98 29.695,23.98 v1(29.715,23.96) ; v1(35.882,16.421) 35.882,17.678 45.769,27.564 v1(49.728,27.564)
Disp_B1: D1.1 U8.6 | length 15.1
  Top Layer w0.254: U8.6 26.14,64.46 26.76,63.84 D1.1
Disp_B2: D1.2 U8.5 | length 18.2
  Top Layer w0.254: U8.5 41.46,61.92 D1.2
Disp_B3: D1.3 U8.9 | length 26.3
  Top Layer w0.254: U8.9 25.126,71.206 25.126,69.178 27.718,66.585 43.175,66.585 D1.3
Disp_B4: D1.4 U8.4 | length 24.6
  Top Layer w0.254: U8.4 26.149,59.529 26.149,60 27,60 28,61 45.62,61 D1.4
Disp_B5: D1.5 U8.8 | length 27.4
  Top Layer w0.254: U8.8 45.3,69.54 D1.5
Disp_B6: D1.6 U8.12 | length 40.3
  Top Layer w0.254: U8.12 19.14,73 26.317,73 26.874,72.442 26.874,71.718 26.851,71.695 26.851,71.149 27,71 46.38,71 D1.6
Disp_B7: D1.7 U8.3 | length 41.9
  Top Layer w0.254: U8.3 29.423,60.263 51.101,60.263 54.344,63.507 54.344,68.244 53.54,69.048 D1.7
Disp_B8: D1.8 U8.13 | length 39.5
  Top Layer w0.254: U8.13 17,70.76 17,73 17.339,73.339 18.751,73.339 18.818,73.406 36.699,73.406 38.105,72 49,72 D1.8
Disp_B9: D1.9 U8.14 | length 48
  Top Layer w0.254: U8.14 15.993,69.227 15.922,69.227 14,71.149 14,75.851 14.149,76 36,76 39,73 43.518,73 44.357,73.839 44.357,74.357 45,75 47.46,75 D1.9
Disp_B10: D1.10 U8.7 | length 46.9
  Top Layer w0.254: U8.7 25,68 18.523,68 16.106,70.418 16.106,73.597 16.254,73.746 18.582,73.746 20.331,75.494 35.185,75.494 38.086,72.594 44.514,72.594 D1.10
Disp_B11: D1.11 U8.2 | length 56.7
  Top Layer w0.254: U8.2 34.3,54.3 38,58 50,58 55,63 55,73.678 52.678,76 45.38,76 D1.11
Disp_B12: D1.12 U8.15 | length 43.7
  Top Layer w0.254: U8.15 18.041,64.639 18.041,65.426 13,70.467 13,76.851 13.149,77 37.84,77 D1.12
GND: 1.1 C1.1 C2.1 C3.1 C4.2 C5.2 C6.1 C7.2 C8.2 C9.2 C10.1 C11.1 C12.1 C13.1 C14.1 C15.1 J1.3 J2.A1/B12 J2.B1/A12 J2.S1 J2.S2 J2.S3 J2.S4 LED1.1 LED2.1 LED3.1 LED4.1 LED5.1 R8.1 R9.1 R25.1 U1.4 U2.8 U3.7 U4.1 U5.1 U6.1 U7.1 U8.1 | length 1.5
  Top Layer w0.254: U4.1@27.345,19.93 U4.1 ; C3.1@33.2,25.55 C3.1 ; U2.8@57.876,54.275 57.928,54.327 U2.8@57.928,54.331 ; LED4.1@70.91,52.975 LED4.1 ; LED5.1@70.91,59.975 LED5.1 ; 1.1 1.1@71,29.025 ; LED1.1 LED1.1@71,35.025 ; LED2.1 LED2.1@71,41.025
Net1_2: 1.2 R1.2 | length 6.1
  Top Layer w0.254: R1.2 64.931,31.17 67.431,31.17 69.6,29 1.2
NetC5_1: C5.1 U3.8 | length 10.8
  Top Layer w0.254: U3.8 46.375,47.625 47.696,46.304 50.71,46.304 50.925,46.089 C5.1
NetC11_2: C11.2 R15.2 R24.1 U5.5 U8.17 | length 42.9
  Top Layer w0.254: R24.1 5.361,54.475 6.886,56 9,56 10.675,57.675 C11.2 16.515,57.675 U8.17 22,55.6 22,53 25,50 27.851,50 28,49.851 R15.2 28,45.149 27.851,45 22.449,45 22.3,44.851 U5.5
NetC12_2: C12.2 R16.2 R23.1 U5.6 U8.18 | length 36.8
  Top Layer w0.254: C12.2 11,50.391 8,53.391 R23.1 15.855,54.475 U8.18 20.2,54.86 20.2,50.8 22,49 24,49 25,48 R16.2 24.974,46.526 23.014,46.526 21.65,45.163 U5.6
NetJ1_1: J1.1 R4.1 U3.4 | length 43.3
  Top Layer w0.254: R4.1 40,44 41,45 41.875,45 U3.4 44.025,45.025 v1(45,46) ; v1(55,58) 60,58 65.19,63.19 J1.1
  Bottom Layer w0.254: v1(45,46) 50,46 55,51 v1(55,58)
NetJ1_2: J1.2 U3.18 | length 57.8
  Top Layer w0.254: v1(33,43) 34.475,44.475 36,44.475 U3.18 ; v1(64,60) 67.73,63.73 J1.2
  Bottom Layer w0.254: v1(33,43) 37,39 40,39 44,43 51,43 55.406,47.406 55.406,55.851 55.555,56 60,56 v1(64,60)
NetJ2_A5: J2.A5 R8.2 | length 20.1
  Top Layer w0.254: v1(32.186,10.314) 33.345,10.314 33.715,9.944 R8.2 ; v1(38.072,17.3) 39.509,15.864 39.509,12.491 40.758,11.242 J2.A5@40.758,10.504
  Bottom Layer w0.254: v1(32.186,10.314) 38.072,16.2 v1(38.072,17.3)
NetJ2_A6: J2.A6 J2.B6 U7.5 | length 49.5
  Top Layer w0.254: v1(38.807,19.31) 41.75,16.367 J2.A6 ; J2.B6 42.75,15.296 42.899,15.445 52.425,15.445 52.446,15.466 ; v1(51.503,16.409) 52.446,15.466 ; U7.5 53.784,10.365 53.635,10.514 53.635,14.278 52.446,15.466
  Bottom Layer w0.254: v1(38.807,19.31) 39.979,20.481 47.957,20.481 50.025,18.413 50.7,18.413 51.503,17.61 v1(51.503,16.409)
NetJ2_A7: J2.A7 J2.B7 U7.6 | length 48.2
  Top Layer w0.254: J2.B7 41.25,15.415 37.768,18.897 37.768,20.481 38.536,21.249 40.334,21.249 41.75,19.832 v1(41.75,18.718) 41.75,18.443 42.25,17.943 J2.A7 ; v1(53,7) 53.014,7.014 53.014,7.867 54.241,9.095 U7.6
  Bottom Layer w0.254: v1(41.75,18.718) 44.334,18.718 53,10.052 v1(53,7)
NetJ2_B5: J2.B5 R9.2 | length 11.9
  Top Layer w0.254: J2.B5 43.75,11.669 44.4,12.319 44.4,13.203 v1(45.2,14.003) ; R9.2 49.513,8.692 49.513,10.052 v1(49.537,10.075)
  Bottom Layer w0.254: v1(45.2,14.003) 45.404,14.003 49.332,10.075 v1(49.537,10.075)
NetLED1_2: LED1.2 R2.2 | length 5.6
  Top Layer w0.254: R2.2 68.538,36 69.538,35 LED1.2
NetLED2_2: LED2.2 R3.2 | length 5.2
  Top Layer w0.254: R3.2 64.935,41.035 66.616,41.035 66.651,41 LED2.2
NetLED3_2: LED3.2 R5.2 | length 5.5
  Top Layer w0.254: R5.2 68.453,46 69.453,47 LED3.2
NetLED4_2: LED4.2 R6.2 | length 5.9
  Top Layer w0.254: R6.2 64.913,51.013 65.382,51.013 67.369,53 LED4.2
NetLED5_2: LED5.2 R7.2 | length 7.9
  Top Layer w0.254: R7.2 66.911,56 67,56.089 67,58 69,60 LED5.2
NetR1_1: R1.1 U2.1 | length 21
  Top Layer w0.254: U2.1@58.744,49.725 58.744,49.256 61,47 61,45 62,44 62,37 63,36 63,31.707 63.525,31.183 63.956,31.183 R1.1
NetR2_1: R2.1 U2.2 | length 17.5
  Top Layer w0.254: U2.2 58.745,50.395 60.349,50.395 60.784,49.96 60.784,48.216 62,47 62,45 63,44 63,37.504 63.997,36.507 63.997,36.003 R2.1
NetR3_1: R3.1 U2.3 | length 13.4
  Top Layer w0.254: U2.3 60.739,51.025 62,49.764 62,48 63,47 63,45 64,44 R3.1
NetR5_1: R5.1 U2.4 | length 9.4
  Top Layer w0.254: U2.4 60.936,51.675 62.611,50 63,50 64,49 R5.1
NetR6_1: R6.1 U2.5 | length 5.8
  Top Layer w0.254: U2.5@58.729,52.329 62.671,52.329 63.852,51.148 63.877,51.148 64,51.025 R6.1
NetR7_1: R7.1 U2.6 | length 6.5
  Top Layer w0.254: U2.6 60.113,52.975 63.138,56 R7.1
NetR10_1: R10.1 R12.2 SW1.4 | length 5.8
  Top Layer w0.152: R10.1 13,37 SW1.4
  Top Layer w0.254: R12.2 11.043,34.949 11.043,35.422 11.471,35.85 SW1.4@14,35.85
NetR11_2: R11.2 U3.13 U5.3 | length 26.6
  Top Layer w0.254: U5.3 21.65,40.475 21.821,40.646 21.821,40.761 22.059,41 24.851,41 25,40.851 R11.2 26.5,37.5 27,38 27,40.851 27.149,41 29,41 30,42 30,46 31.527,47.527 36.002,47.527 U3.13
NetR12_1: R12.1 R22.2 SW2.4 | length 13.7
  Top Layer w0.254: R22.2 11,27 12.25,28.25 SW2.4 13.528,28.472 12.594,28.472 11.033,30.033 R12.1
NetR13_1: R13.1 U5.8 | length 3.9
  Top Layer w0.254: R13.1 18,43.295 18.149,43.146 18.854,43.146 19.708,44 U5.8
NetR14_2: R14.2 U3.14 U5.4 | length 25.8
  Top Layer w0.254: U5.4 22.3,38.23 24.53,36 25.876,36 27.376,37.5 30.151,37.5 31,38.349 31,46 31.877,46.877 35.952,46.877 U3.14@36.075,47
NetR17_2: R17.2 U3.2 U6.3 | length 19.7
  Top Layer w0.254: U3.2 48.116,43.725 52,39.841 R17.2 53.5,38.5 54.675,37.325 U6.3
NetR18_1: R18.1 U6.8 | length 3.4
  Top Layer w0.254: R18.1 55.475,28.475 56,29 56,30.1 U6.8
NetR19_2: R19.2 U3.3 U6.4 | length 22.6
  Top Layer w0.254: U3.3 41.802,44.277 41.082,44.277 40.406,43.602 40.406,42.149 40.555,42 45.488,42 48,39.488 48,37.149 48.149,37 52.47,37 54.025,35.445 U6.4
NetR20_2: R20.2 U6.5 U7.2 | length 23.7
  Top Layer w0.254: U6.5 54.025,29.9 53.539,29.413 53.413,29.413 53,29 53,21.675 55.5,19.175 R20.2 54,19 53,18 53,17.639 53.149,17.49 55.908,17.49 56.6,16.799 56.6,14.517 56.258,14.175 U7.2
NetR21_2: R21.2 U6.6 U7.3 | length 22.2
  Top Layer w0.254: U6.6 54.675,28.675 54,28 54,23.601 54.568,23.033 55.467,23.033 R21.2 57.372,23 57.521,22.851 57.521,18.009 57.528,18.002 57.528,14.101 56.332,12.905 U7.3
NetR22_1: R22.1 SW3.4 | length 5.5
  Top Layer w0.254: R22.1 11,20.399 11.149,20.25 SW3.4
NetR25_2: R25.2 SW1.1 SW2.1 SW3.1 U3.19 | length 70.7
  Top Layer w0.254: SW3.1@20,15.5 20,16.15 20.15,16.15 20.373,16.373 20.373,16.523 22,18.15 22,20.876 ; SW1.1@20,32.15 20.15,32.15 20.424,31.876 SW1.1@20.424,31.726 ; SW3.1 20.25,14.246 20.101,14.097 18.356,14.097 18,13.741 R25.2 20.642,13 20.952,13.309 v1(21.227,13.309) ; SW2.1 20.25,22.626 22,20.876 ; SW1.1 20.25,30.343 22,28.593 22,20.876 ; v1(32,38) 34.406,40.406 34.406,42.752 35.282,43.627 36.002,43.627 U3.19
  Bottom Layer w0.254: v1(21.227,13.309) 24,16.083 24,30 26,32 32,32 v1(32,38)
NetU1_2: U1.2 U3.12 | length 63.1
  Top Layer w0.254: U3.12 36.002,48.373 35.282,48.373 34,49.655 34,52 39,57 50,57 56,63 56,74 53,77 43,77 40.73,79.27 U1.2
NetU1_3: U1.3 U3.10 | length 35.5
  Top Layer w0.254: U3.10 41.902,48.925 42,49.023 v1(42,51) ; U1.3 43.27,80.73 v1(45,79)
  Bottom Layer w0.254: v1(42,51) 45,54 v1(45,79)
NetU2_11: U2.11 U3.16 | length 20.7
  Top Layer w0.254: U3.16@36,45.821 36.966,45.821 38,46.855 38,51 39.975,52.975 U2.11
NetU2_12: U2.12 U3.17 | length 20.4
  Top Layer w0.254: U3.17 36.198,45.123 36.918,45.123 38.406,46.611 38.406,50.406 40.325,52.325 U2.12
NetU2_14: U2.14 U3.15 | length 28.8
  Top Layer w0.254: U3.15 36.198,46.423 36.918,46.423 37.456,46.961 37.456,52.456 39.779,54.779 52.713,54.779 53,54.492 53,51.174 52.851,51.025 U2.14
pads on no net: J2. J2.A8 J2.B8 SW1.2 SW1.3 SW2.2 SW2.3 SW3.2 SW3.3 U1. U2.7 U2.9 U2.10 U2.13 U2.15 U3.1 U3.5 U3.6 U3.11 U3.20 U7.4 U7.7 U7.8 U7.9 U7.10 U7.11 U7.12 U7.13 U7.14 U7.15 U8.10 U8.11 U8.19 U8.20

## Polygon pours and split planes (outlines as drawn)
GND on Top Layer "GND_L01_P000" (solid, pour order 0): 0.03,101.318 0.04,101.329 82.767,101.329 82.767,-0.07 82.646,-0.191 82.575,-0.12 0.141,-0.12

## Silkscreen, mask and mechanical layers (free items; w line width, h text height)
Top Solder:
  drawing of 23 lines, arcs and shapes, not listed
Mechanical 1:
  lines w0.254: 0,0 0,101.56 0.021,101.581 82.98,101.581 82.991,101.57 82.991,0.009 83,0 0,0